# Altium PCB PCB2.PcbDoc
Units mil, origin at the board's own origin, x right, y up, seen from the top; angles counter-clockwise.
Board outline 6000 x 4000 mil, 2 copper layers (Top Layer, Bottom Layer); 4 components, 43 nets, 14 pads, 12 vias.
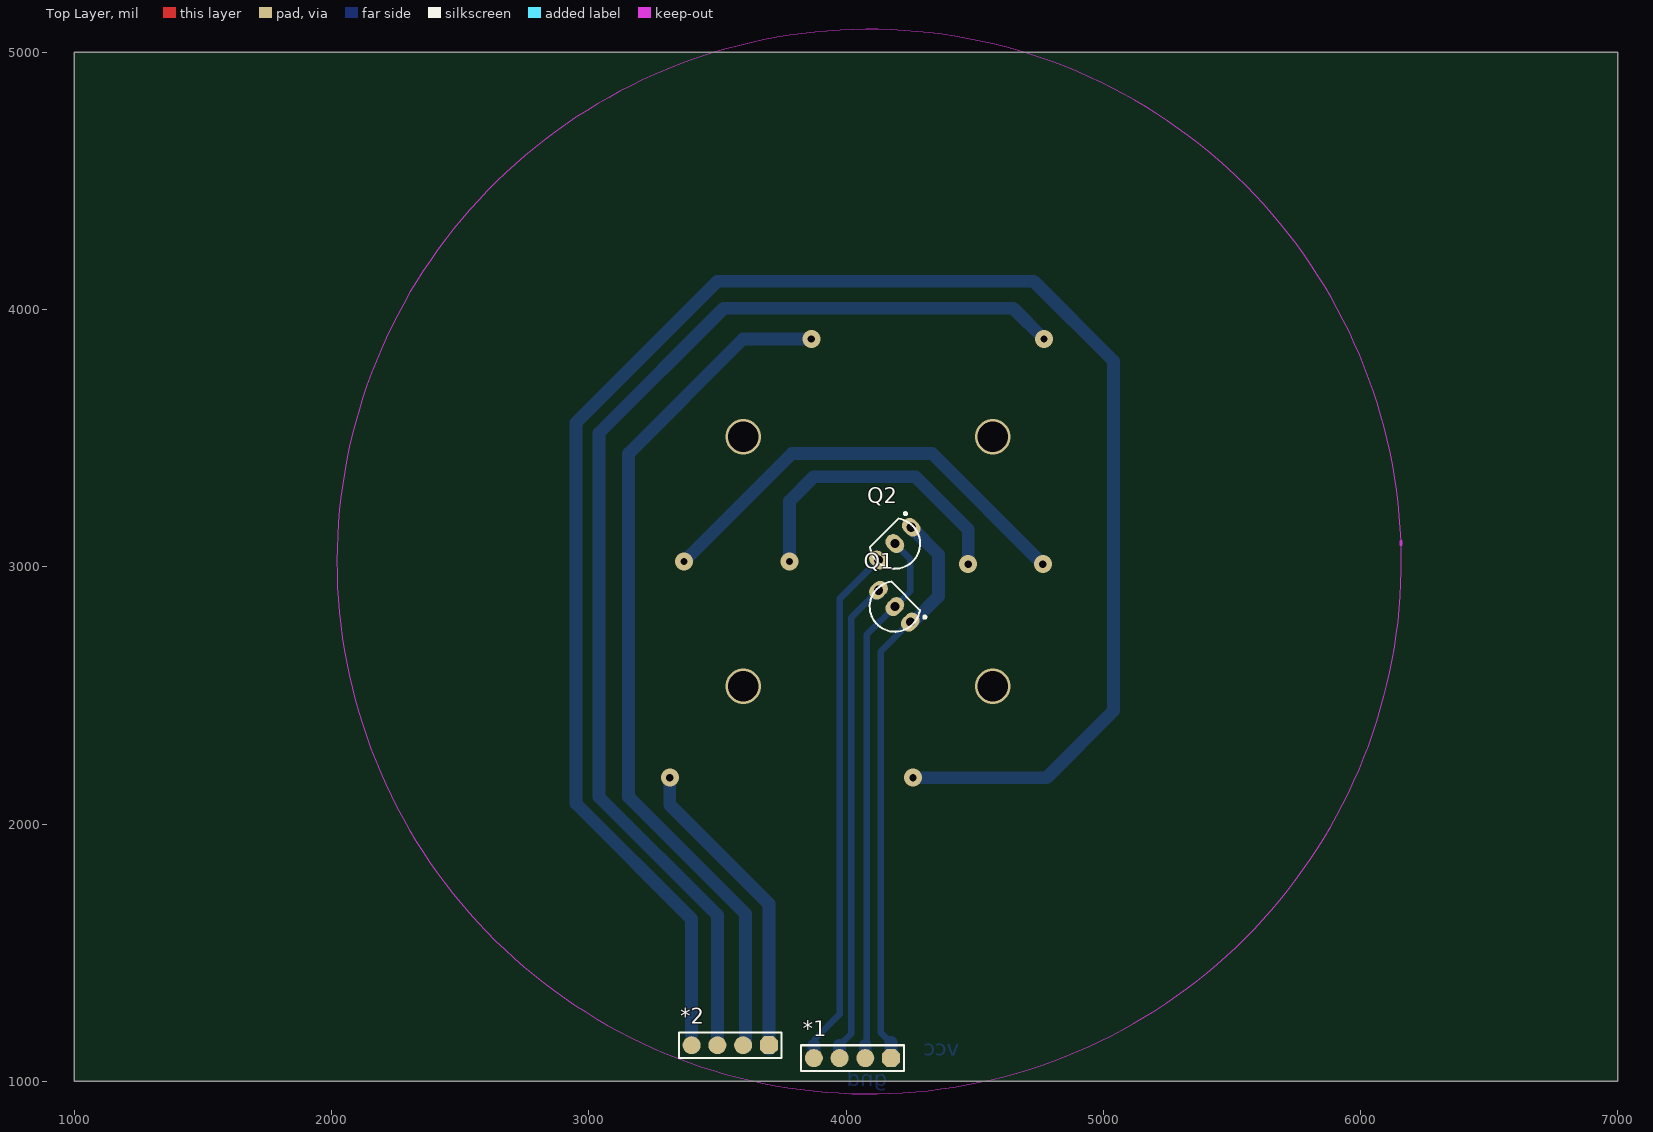
[diagram p0: Top Layer view]
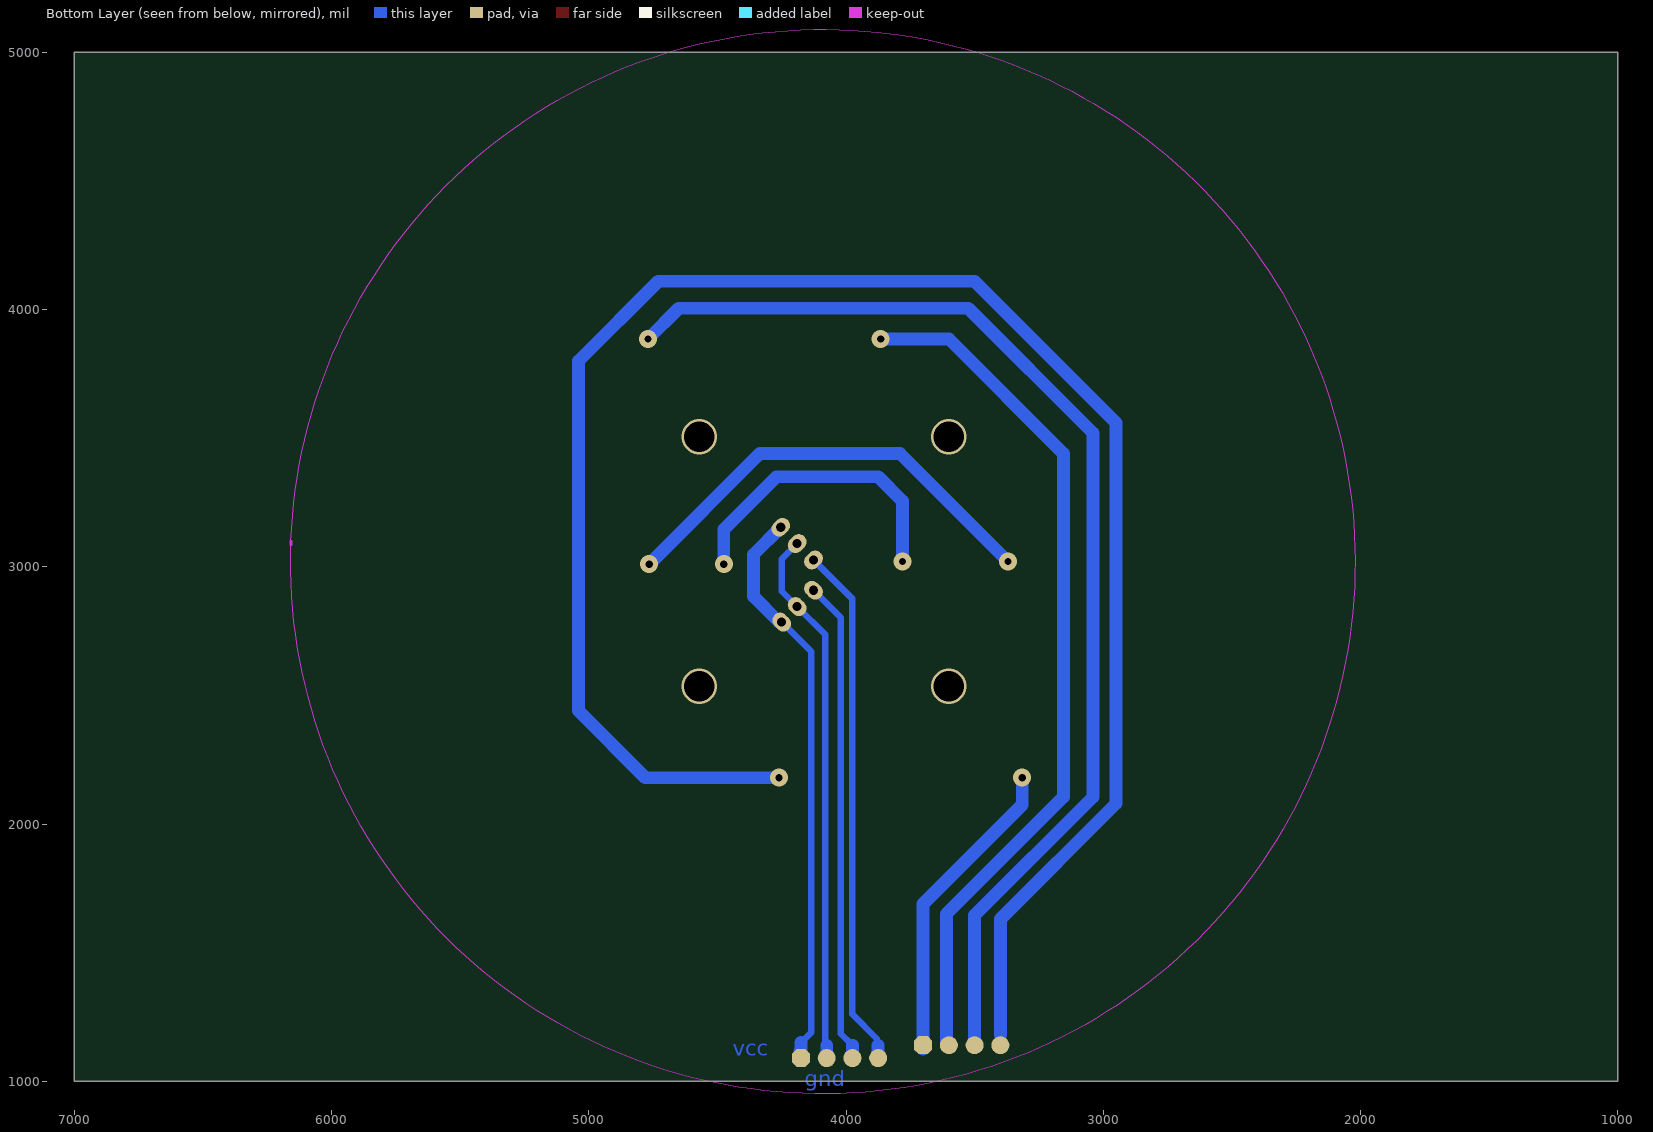
[diagram p1: Bottom Layer view, seen from below]
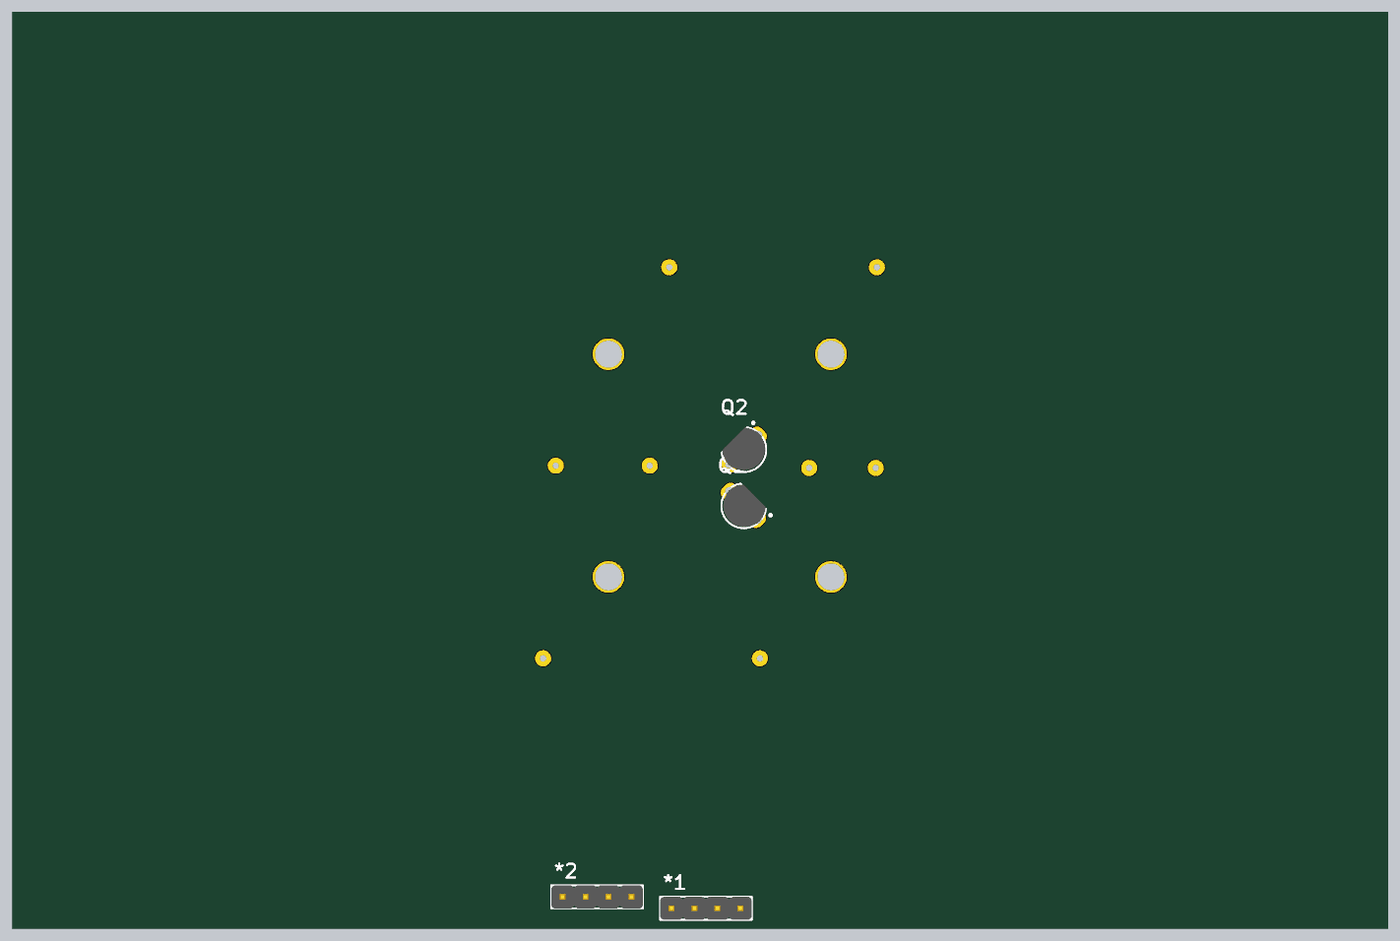
[diagram p2: 3D render of the assembled board from above, using the file's embedded part models]

## Layer stack, top to bottom
Top Solder: solder mask 0.4, Solder Resist, Dk 3.5
Top Layer: signal copper 1.4
Dielectric 1: dielectric 12.6, FR-4, Dk 4.8
Bottom Layer: signal copper 1.4
Bottom Solder: solder mask 0.4, Solder Resist, Dk 3.5

## Board outline
1000,1000 7000,1000 7000,5000 1000,5000

## Design rules (kind name [scope] priority, off if disabled: settings)
Clearance [All] p1: gap=10 ignorepadtopadclearanceinfootprint=FALSE except(0: Arc-Hole Track-Hole SMDPad-Hole THPad-Hole Via-Hole Fill-Hole Poly-Hole Region-Hole Text-Hole)
PolygonConnect [All] p1: connectstyle=Relief reliefconductorwidth=10 reliefentries=4 polygonreliefangle="90 Angle" airgapwidth=10
RoutingVias [All] p1: holewidth=28 width=50 viastyle="Through Hole" minholewidth=28 minwidth=50 maxholewidth=28 maxwidth=50
SolderMaskExpansion [All] p1: expansion=4
Width [All] p1: maxlimit=50 minlimit=10 preferedwidth=30
30 further rules are at their usual default settings.

## Classes and differential pairs
component class Sheet1: Q1 Q2

## Components (designator, comment, footprint, x,y, rotation, side; value= is the part's Value field where it differs from the comment)
*1 "COM4-2.54" COM4-2.54 4025,1090 r180 top
*2 "COM4-2.54" COM4-2.54 3550,1140 r180 top (schematic designator *1)
Q1 "S8050" TO-92#1 4189.9,2845.1 r135 top
Q2 "S8050" TO-92#2 4190,3090 r225 top

## Footprints (in the part's own frame and the unit in brackets; to place one, negate y for a bottom-side part, rotate by r counter-clockwise, add the part's x,y. Pads: shape width x height; smd on the part's side, far side on the other; paste and mask are expansions set on the pad)
COM4-2.54 [mil]
  oct 70x70 all layers, no hole: 1(-150,0)
  round 70 all layers, no hole: 2(-50,0) 3(50,0) 4(150,0)
  silkscreen extent -200,-50 200,50, body extent -200,-50 200,50, height 398
TO-92#1 [mm]
  oval 1.533x2 hole 0.9: 1(-2.159,0) 2(0,0) 3(2.286,0)
  silkscreen extent -2.95,-1.5 2.48,2.48, body extent -2.45,-1.68 2.35,2.32, height 8.09
TO-92#2 [mm]
  oval 1.533x2 hole 0.9: 1(-2.286,0) 2(0,0) 3(2.286,0)
  silkscreen extent -2.95,-1.5 2.48,2.48, body extent -2.45,-1.68 2.35,2.32, height 8.09

## Part data
Q1 Q2: "NPN", Manufacturer #2=8050, PCB DECAL=SOT-23

## Via types
v1: diameter 70, hole 28, Top Layer to Bottom Layer, 8 vias
v2: diameter 137.8, hole 118.11, Top Layer to Bottom Layer, 4 vias

## Nets (pads, with @x,y where several pads share a name; then routed paths per layer and width w, separated by ;. In a path a pad name is that pad's centre, name@x,y a point inside that pad or via, vN(x,y) a via of type N, cw(c..) or ccw(c..) an arc to the next point about the centre after c; other vN are vias at no path point)
3.3v: *1.2 Q1.2 Q2.2 | length 2097.3
  Bottom Layer w25: 4075,1140 4080,1145 4080,2645 4080,2735.21 Q1.2 4250,2905.21 4250,3030 Q2.2
  Bottom Layer w50: *1.2 4075,1140
12v: 
AIN1:  | length 1189.3
  Bottom Layer w50: v1(3780,3020) 3780,3255 3875,3350 4270,3350 4475,3145 v1(4475,3010)
AIN2:  | length 1747.1
  Bottom Layer w50: v1(3370,3020) 3790,3440 4335,3440 v1(4765,3010)
AO1: *2.1 | length 1214.5
  Bottom Layer w50: v1(3315,2180) 3315,2075 3700,1690 *2.1@3700,1125
AO2: *2.2 | length 3377.8
  Bottom Layer w50: *2.2@3610,1145 3610,1650 3155,2105 3155,3440 3600,3885 v1(3865,3885)
BIN1: 
BIN2: 
BO1: *2.4 | length 7260.3
  Bottom Layer w50: 3400,1180 3400,1630 2950,2080 2950,3560 3500,4110 4730,4110 5040,3800 5040,2440 4780,2180 v1(4260,2180)
BO2: *2.3 | length 4531.1
  Bottom Layer w50: *2.3@3500,1160 3500,1645 3040,2105 3040,3520 3525,4005 4650,4005 v1(4770,3885)
boot0: 
boot1: 
GND: *1.1 Q1.1 Q2.1 | length 2233.3
  Bottom Layer w25: 4135,2479.04 4135.44,2478.6 ; 4175,1150 4135.44,1189.56 4135.44,2478.6 ; Q1.1 4135.44,2670.44 4135.44,2478.6
  Bottom Layer w50: 4175,1150 4175,1114.98 4179.5,1114.98 4180,1114.48 *1.1@4180,1085 ; Q1.1 4260,2785 4360,2885 4360,3047.28 Q2.1
hoer1: *1.3 Q1.3 | length 1874.3
  Bottom Layer w25: 3980,1145 4020,1185 4020,2655 4020,2802.49 Q1.3
  Bottom Layer w50: *1.3 3975,1140
hoer2: *1.4 Q2.3 | length 2018.4
  Bottom Layer w25: 3880,1165 3975,1260 3975,2620 3975,2875 Q2.3
  Bottom Layer w50: *1.4@3875,1085 3875,1140
LED1: 
LED2: 
LED3: 
LED4: 
Net*3_9: 
Net*6_2: 
Net*9_2: 
Net*14_6: 
NetD1_1: 
NetD2_1: 
NetD3_1: 
NetD4_1: 
NRST: 
OSC_IN: 
OSC_OUT: 
PWMA: 
PWMB: 
RX: 
SCL: 
SDA: 
STBY: 
SW1: 
SW2: 
SW3: 
SW4: 
SWCLK: 
SWDIO: 
TX: 
copper on no net:
  other v2: 3600,2535 4570,2535 3600,3506.08 4570,3506.08

## Polygon pours and split planes (outlines as drawn)
no net on Bottom Layer "Bottom Layer-No Net" (solid, pour order 10): 4215,3020
no net on Bottom Layer "Bottom Layer-No Net 1" (solid, pour order 8): 4240,3025

## Keep-outs
Keep-Out Layer:
  lines w0: 6157.57,3099.35 ccw(c4090,3020) 6158.07,3084.94
  lines w10: 6157.57,3085.44 6157.57,3099.35 ; 8047.7,3149.49 ccw(c4000,2980) 8047.69,3149.9

## Other copper
Bottom Layer:
  region: 4260,3040
  text "vcc" at 4440,1100 h60
  text "gnd" at 4160,980 h60